# EAGLE board mechanical-endstop (EAGLE 5.06)
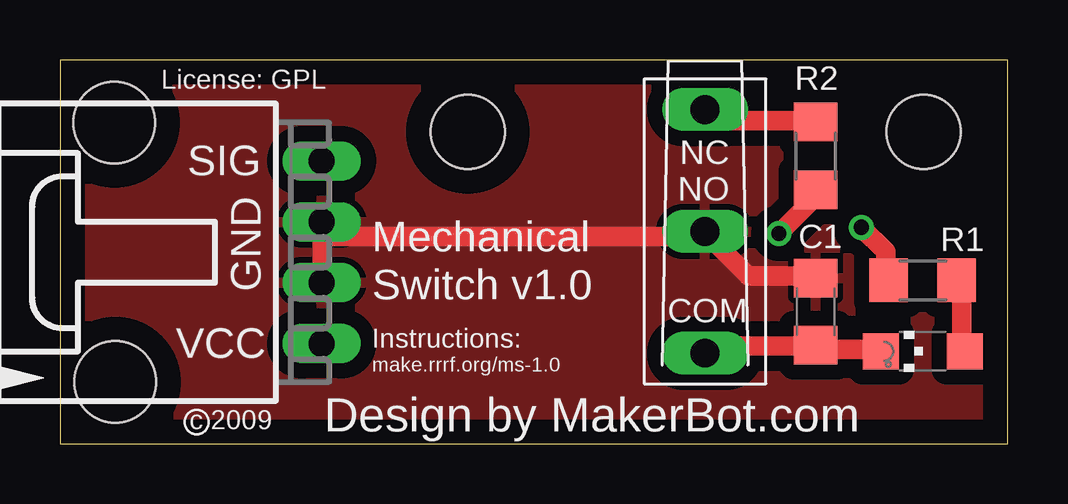
[diagram p0: board, top side]
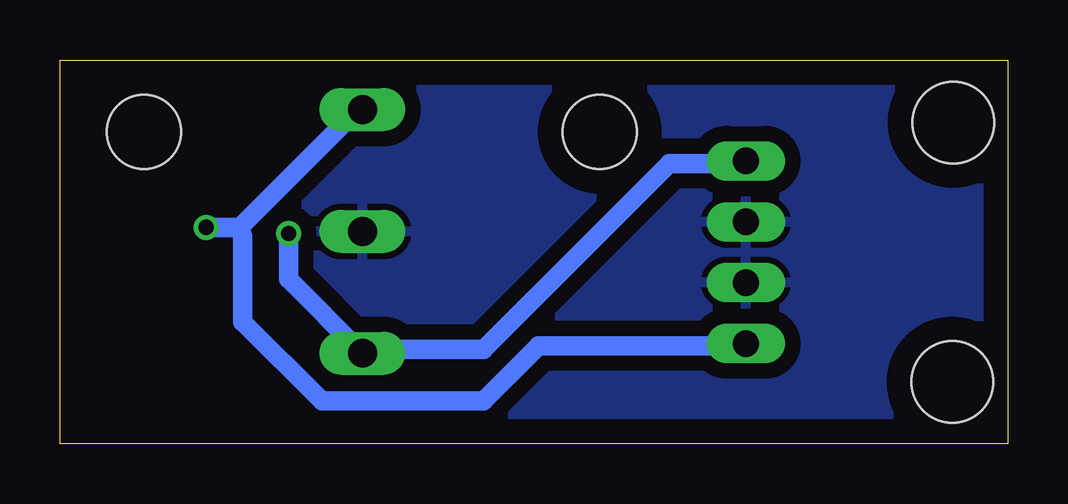
[diagram p1: board, bottom side, seen from below]

Size 39.5 x 16 mm. Coordinates in mm from the lower left corner, seen from the top.
Outline: 0,0 39.5,0 39.5,16 0,16 0,0
Copper layers (1*16): Top 0.035mm / dielectric 1.5mm / Bottom 0.035mm
Design rules "default": minimum track width 10mil, minimum drill 24mil, track to track 8mil, track to pad 8mil, pad to pad 8mil, via to via 8mil, smd to smd 8mil, copper to edge 40mil, drill to drill 8mil, minimum pad ring 10mil, minimum via ring 8mil, stop-mask expansion 4mil, vias tented up to drill 0mil, thermal gap 10mil
Net classes: 0 default: width 0.813 mm, drill 0.635 mm, clearance 0.635 mm

## Footprints (pad centres in the part's own frame; a part is rotated, then mirrored left to right if it is on the bottom)
C1206 = smd 1.6 x 1.8: 1 -1.4,0; 2 1.4,0
CHIPLED_1206 = smd 1.5 x 1.5: A 0,-1.75; C 0,1.75
R1206 = smd 1.6 x 1.803: 1 -1.422,0; 2 1.422,0
70553-04 = drill 1.092 long: 1 -3.81,-7.62; 2 -1.27,-7.62; 3 1.27,-7.62; 4 3.81,-7.62 | hole 3.4: -5.41,0.98; 5.41,1.02
OMRON-D2F = drill 1.2 long: COM 1.27,2.54; NC 11.43,2.54; NO 6.35,2.54
3MMHOLE = hole 3.1: 0,0

## Placement (x,y rotation side)
C1  100nF  [C1206]  31.5,5.5 90 top
DETECT  [CHIPLED_1206]  35.96,3.85 90 top
R1  1K  [R1206]  35.96,6.81 180 top
R2  10K  [R1206]  31.5,12 90 top
U$1  CDROM  [70553-04]  3.29,7.98 90 top
U$2  OMRON-D2F  [OMRON-D2F]  29.43,2.5 90 top
U$5  3MMHOLE  [3MMHOLE]  17,13 0 top
U$6  3MMHOLE  [3MMHOLE]  36,13 0 top

## Library data of the parts
C1 R1 R2 = rcl
DETECT = led
U$1 U$2 U$5 U$6 = reprap

## Nets
GND: C1.2 U$1.2 U$1.3 U$2.NO
N$1: DETECT.A R1.1
N$2: C1.1 DETECT.C R2.1 U$1.4 U$2.COM
VCC: R1.2 R2.2 U$1.1 U$2.NC

## Tracks (layer width: path | path; a pad name or v marks a point on that pad's centre or on a via)
GND
  Top 0.813: U$1.2 10.92,6.73 10.92,9.14 U$1.3 11.3,8.64 26.54,8.64 U$2.NO 26.92,8.76 28.7,6.99 31.5,6.99 C1.2
  pour Bottom: -1.27,17.78 40.64,17.78 40.64,-1.27 -1.27,-1.27
  pour Top: -1.27,17.78 40.64,17.78 40.64,-1.27 -1.27,-1.27
N$1
  Top 0.813: DETECT.A 37.59,3.94 37.59,6.6 37.47,6.73 R1.1
N$2  (via drill 0.64)
  Top 0.813: DETECT.C 34.16,3.94 31.75,3.94 31.62,4.06 C1.1 31.11,4.06 27.18,4.06 26.92,3.81 U$2.COM | v29.97,8.76 31.5,10.29 31.5,10.54 R2.1
  Bottom 0.813: v29.97,8.76 29.97,6.86 26.92,3.81 U$2.COM 26.54,3.94 21.84,3.94 14.1,11.68 10.92,11.68 U$1.4
VCC  (via drill 0.64)
  Top 0.813: v33.4,9.02 34.42,8 34.42,6.86 R1.2 | R2.2 31.5,13.46 27.3,13.46 26.92,13.84 U$2.NC
  Bottom 0.813: 32,9.02 v33.4,9.02 | 32,9.02 27.18,13.84 26.92,13.84 U$2.NC | U$1.1 10.92,4.06 19.56,4.06 21.84,1.78 28.57,1.78 31.88,5.08 31.88,8.64 32,9.02

## Text on the board
tPlace: License: GPL | SIG | Mechanical | GND | Switch v1.0 | VCC | Instructions: | make.rrrf.org/ms-1.0 | c 2009 | Design by MakerBot.com